# EasyEDA board design.brd
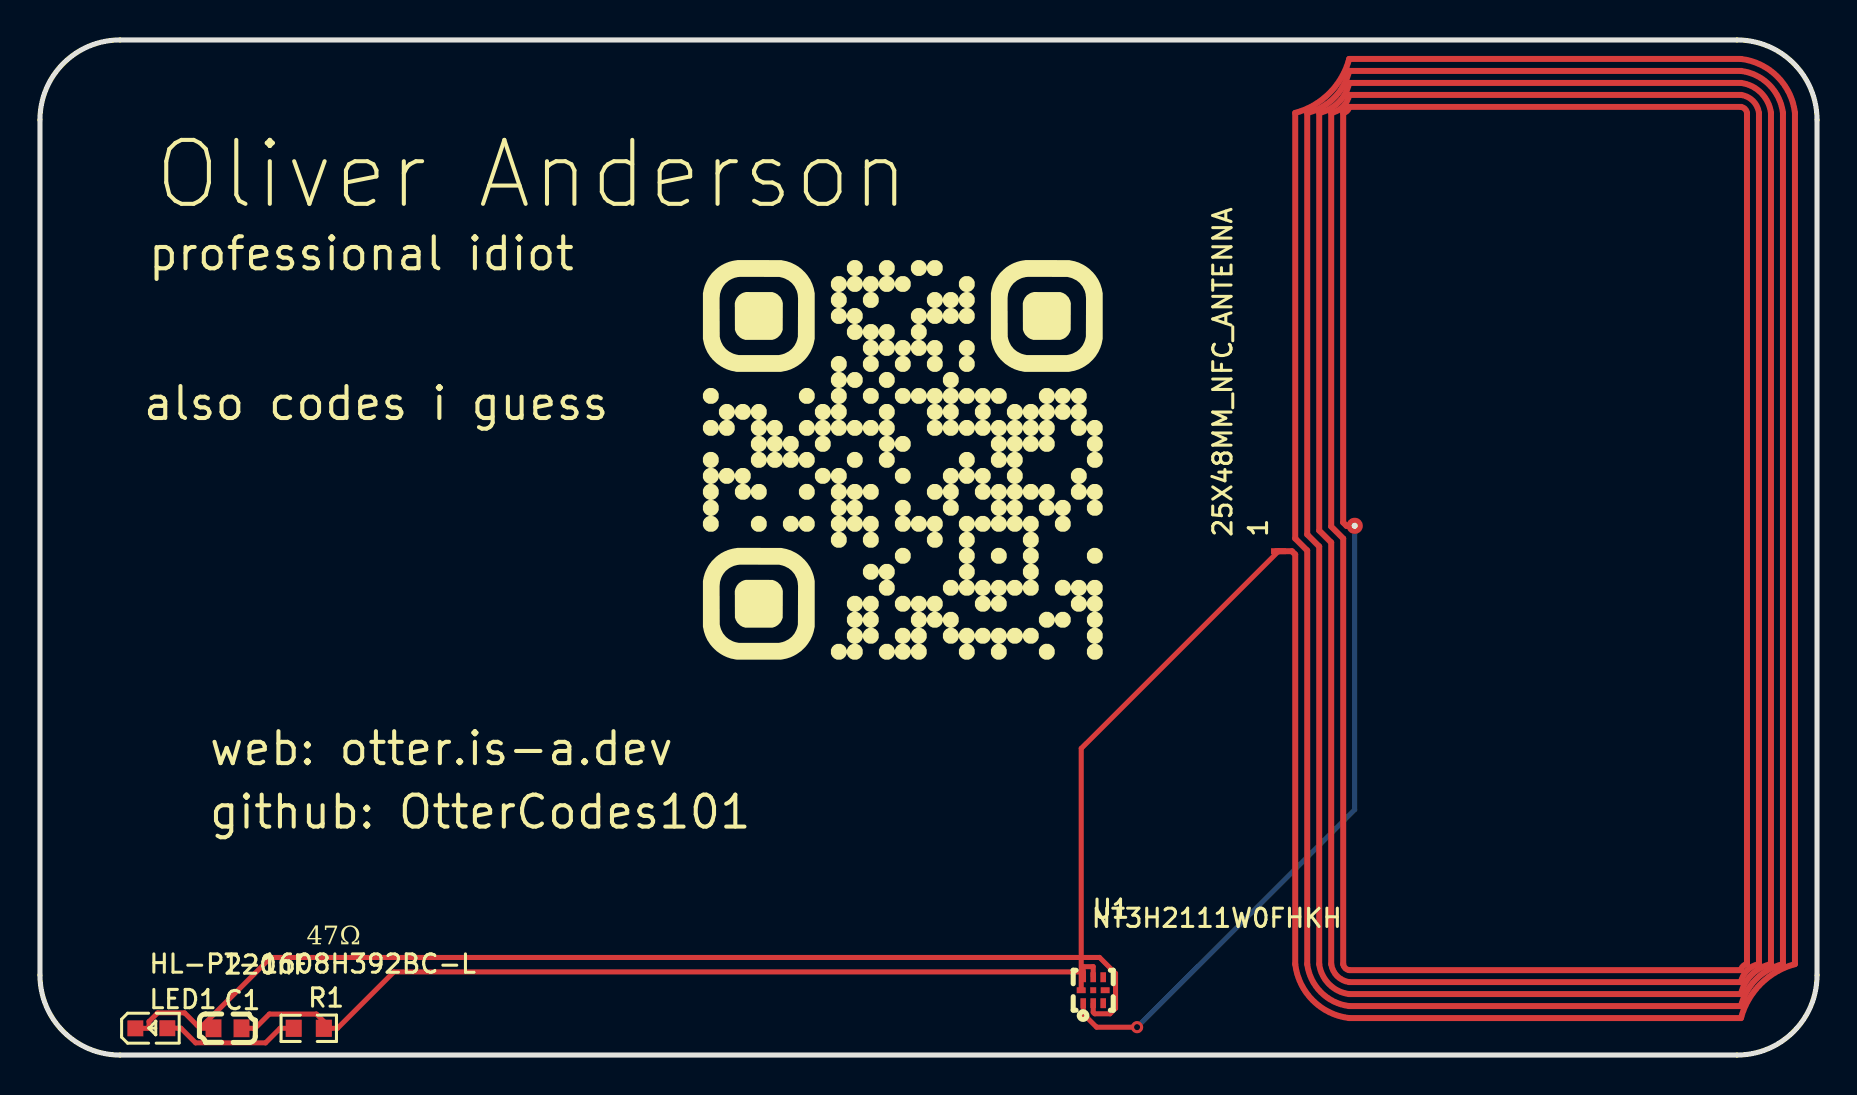
[diagram p0: board, top side]
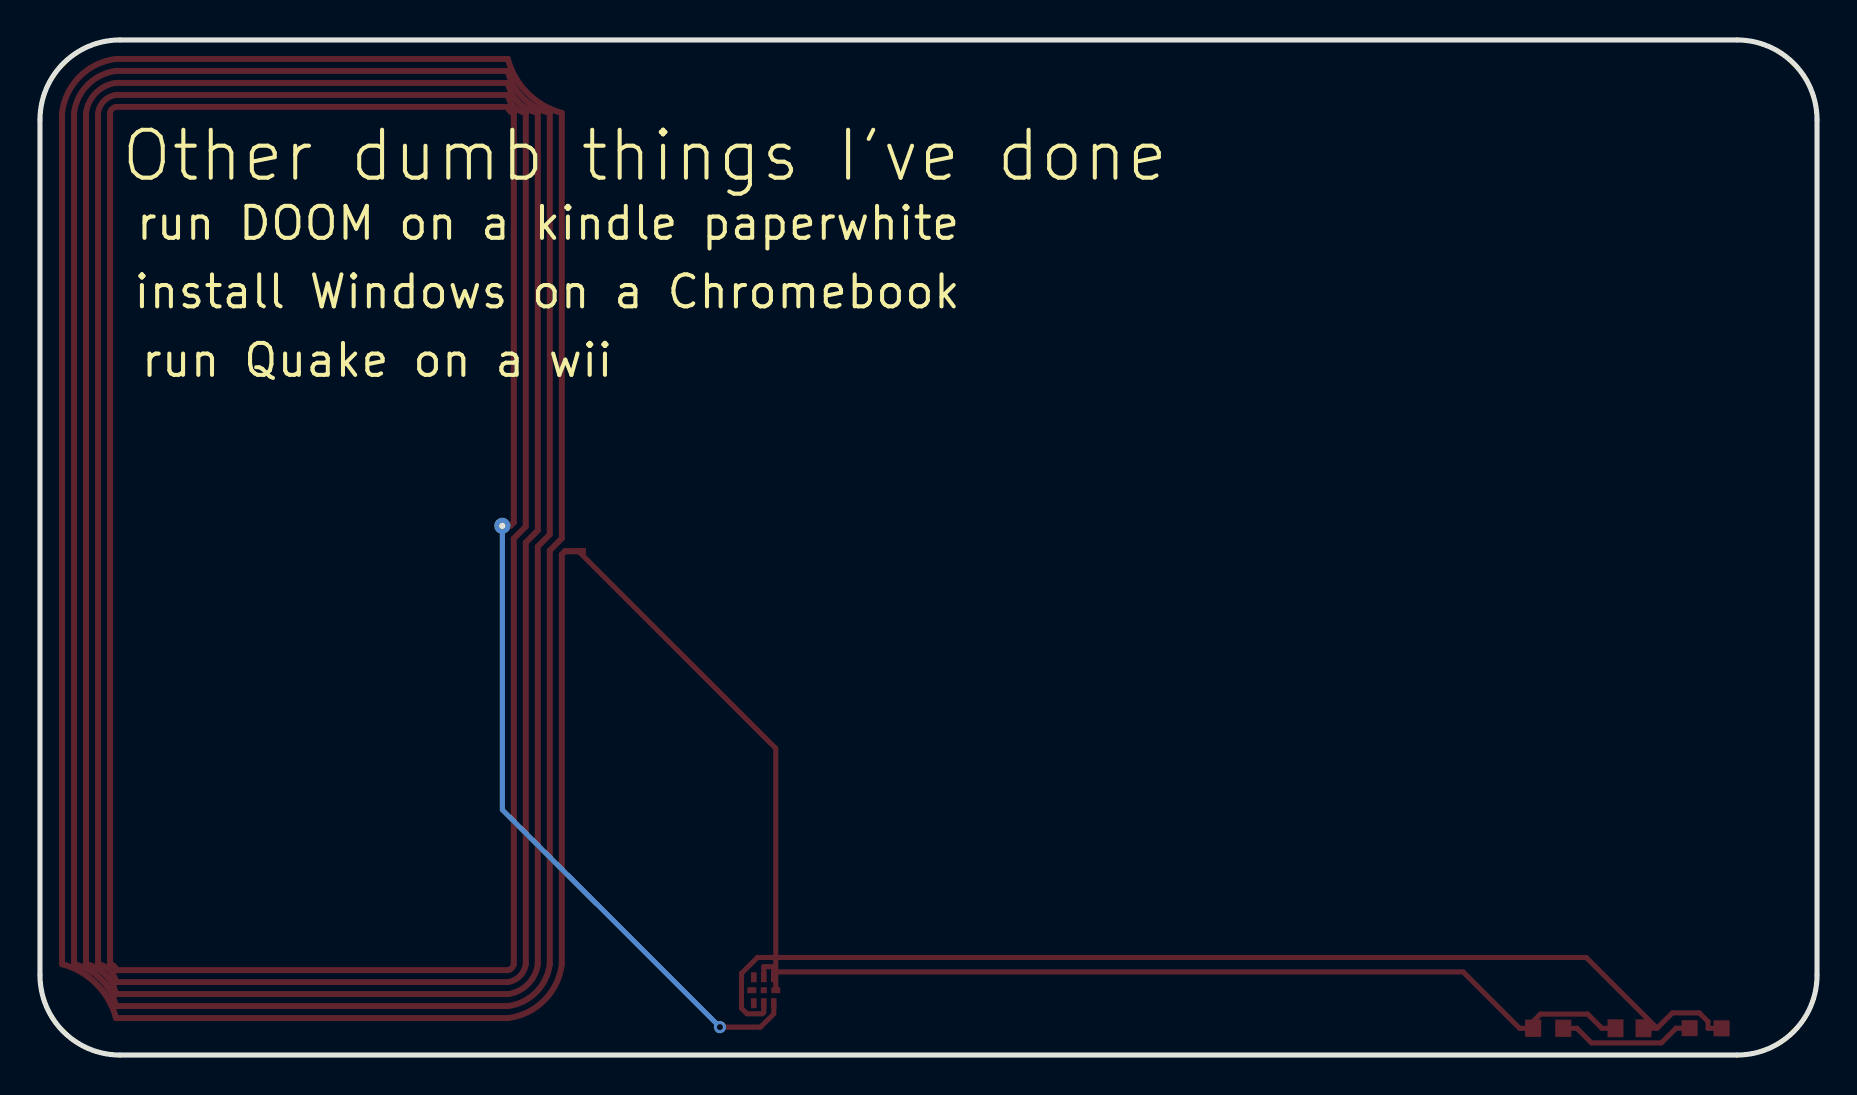
[diagram p1: board, bottom side, seen from below]

Outline 88.9 x 50.8 mm; copper layers: TopLayer, BottomLayer. Coordinates in mm from the lower left corner of the outline.
Outline path: 0,46.8 arc(1.17,49.63) 4,50.8 84.9,50.8 arc(87.73,49.63) 88.9,46.8 88.9,4 arc(87.73,1.17) 84.9,0 4,0 arc(1.17,1.17) 0,4 0,46.8

## Design rules (mm)
Default: track 0.254, clearance 0.152, via 0.61, via hole 0.305

## Placement (name value [footprint] x y rotation side)
1  -  [25X48MM_NFC_ANTENNA]  75.3 25.85 90 top
C1  220nF  [C0603]  9.38 1.34 0 top
LED1  HL-PT-1608H392BC-L  [LED0603-RD_BLUE]  5.57 1.34 0 top
R1  47Ω  [R0603]  13.45 1.34 0 top
U1  NT3H2111W0FHKH  [XQFN-8_L1.6-W1.6-P0.50-BL]  52.69 3.24 0 top

## Footprints (pads in the part's own frame, mm; a bottom-side part is the same pattern mirrored in y, then rotated)
25X48MM_NFC_ANTENNA
  rect 0.3x0.75 smd: P$1(-0.635,13.335)
  oval 0.808x0.808 hole 0.3x0.3: P$2(0.635,9.525)
C0603
  rect 0.8x0.9 smd: 1(-0.7,0) 2(0.7,0)
LED0603-RD_BLUE
  rect 0.8x0.8 smd: 1(-0.8,-0.004) 2(0.799,0.004)
R0603
  rect 0.806x0.864 smd: 1(-0.753,0) 2(0.753,0)
XQFN-8_L1.6-W1.6-P0.50-BL
  rect 0.28x0.5 smd: 1(-0.5,-0.65) 2(0,-0.65) 3(0.5,-0.65) 5(0.5,0.65) 6(0,0.65) 7(-0.5,0.65)
  rect 0.45x0.3 smd: 4(0.6,0) 8(-0.6,0)
  rect 0.3x0.3 smd: 9(0,0)

## Nets
LED2_2: LED1.2 R1.1
U1_1: 1.P$2 U1.1
U1_2: C1.1 LED1.1 U1.2
U1_3: U1.3
U1_4: U1.4
U1_5: U1.5
U1_7: C1.2 R1.2 U1.6 U1.7
U1_8: 1.P$1 U1.8
U1_9: U1.9

## Via types
v1: diameter 0.61, hole 0.305, TopLayer to BottomLayer, 1 via

## Routing (per net, layer and track width the routed paths; a pad name or vN(x,y) marks a point on that pad's centre or on a via; arc(x,y) is an arc through that point)
LED2_2: length 6.9
  TopLayer w0.254: R1.1 12.01,1.34 11.28,0.61 7.79,0.61 7.05,1.34 LED1.2
U1_1: length 54.7
  TopLayer w0.254: U1.1 52.19,2.06 52.86,1.39 v1(54.88,1.39) ; 65.5,47.45 65.47,47.45 65.44,47.45 65.42,47.44 65.4,47.43 65.37,47.42 65.35,47.41 65.33,47.4 65.31,47.39 65.29,47.37 65.27,47.35 65.26,47.33 65.24,47.31 65.23,47.29 65.22,47.27 65.21,47.25 65.21,47.22 65.2,47.2 65.2,47.17 65.2,47.15 65.2,26.65 65.36,26.48 1.P$2
  BottomLayer w0.254: v1(54.88,1.39) 65.77,12.28 1.P$2
U1_2: length 55.8
  TopLayer w0.254: C1.1 8,1.34 ; 8,1.34 11.55,4.88 53.01,4.88 53.81,4.08 53.81,2.34 53.53,2.06 52.77,2.06 52.69,2.14 U1.2 ; 8,1.34 7.23,2.11 5.89,2.11 5.45,1.68 5.45,1.34 LED1.1
U1_7: length 45.8
  TopLayer w0.254: 14.54,1.34 14.88,1.34 17.7,4.16 52.19,4.16 ; 14.54,1.34 13.83,2.05 11.48,2.05 10.76,1.34 C1.2 ; 14.54,1.34 R1.2 ; U1.6 52.69,4.42 52.19,4.42 52.19,4.16 ; U1.7 52.19,4.16
U1_8: length 26.1
  TopLayer w0.254: U1.8 52.09,15.34 61.96,25.22

## Text on the board
BottomSilkLayer: run Quake on a wii | run DOOM on a kindle paperwhite | install Windows on a Chromebook | Other dumb things I've done
TopSilkLayer: also codes i guess | professional idiot | web: otter.is-a.dev | github: OtterCodes101 | Oliver Anderson
